# Altium PCB 百味勺子（立创EDA、AD）_2021-08-16.pcbdoc
Units mm, origin at the board's own origin, x right, y up, seen from the top; angles counter-clockwise.
Board outline 55.17 x 100.31 mm, 2 copper layers (Top Layer, Bottom Layer); 64 components, 36 nets, 177 pads, 29 vias.
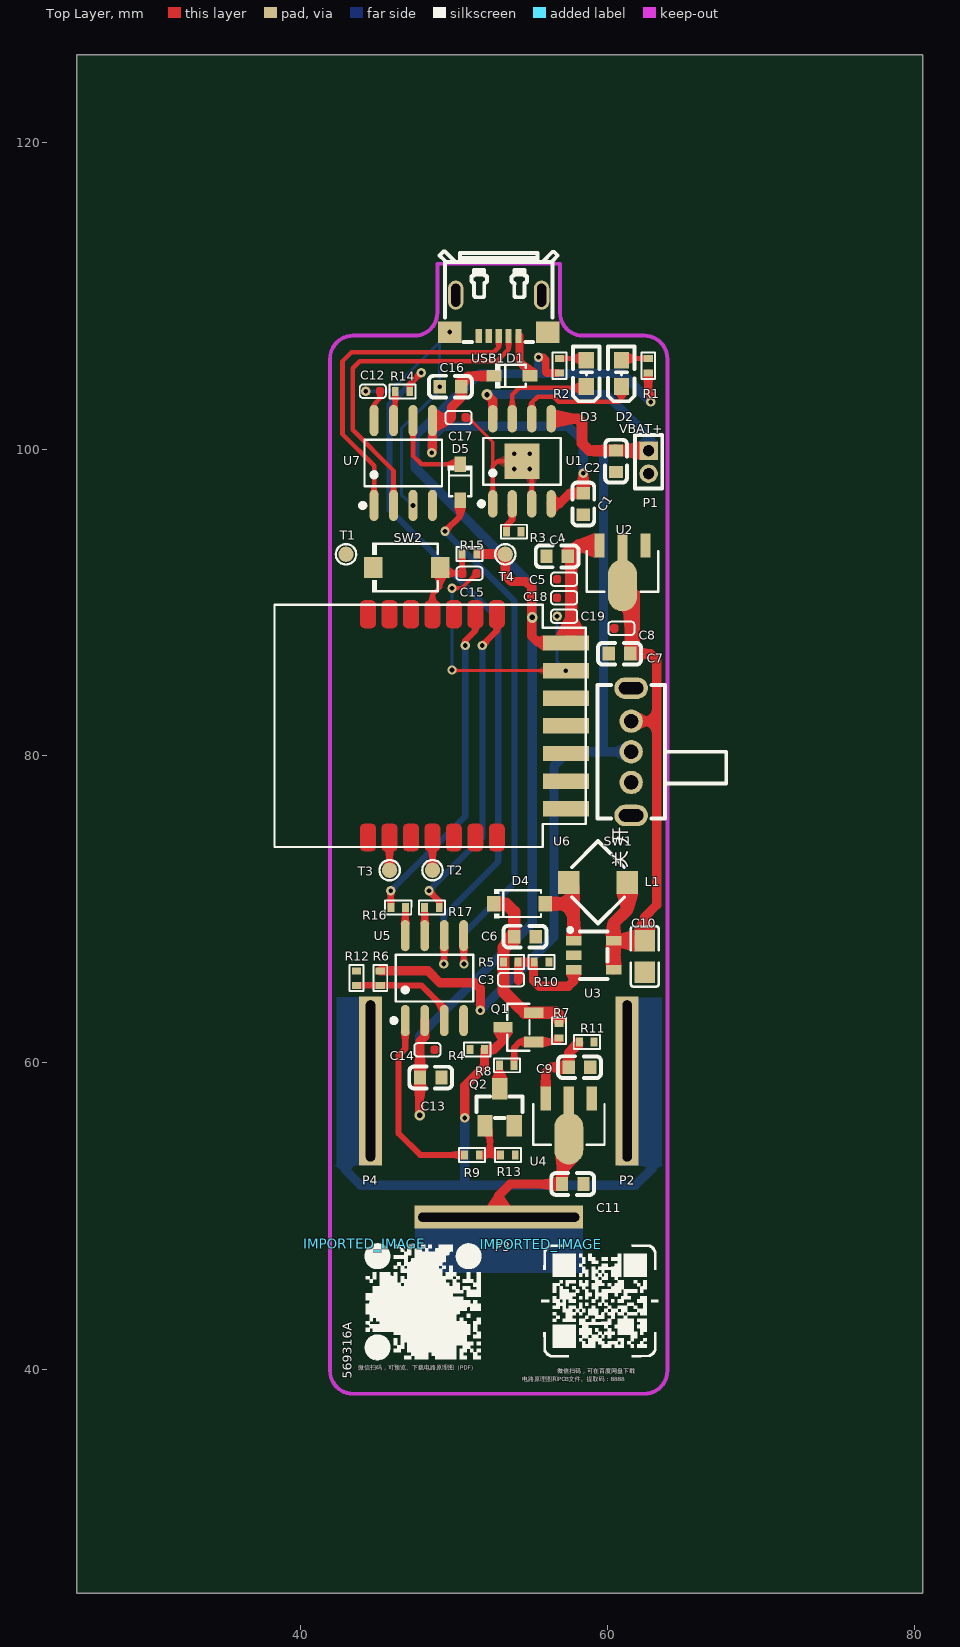
[diagram p0: Top Layer view]
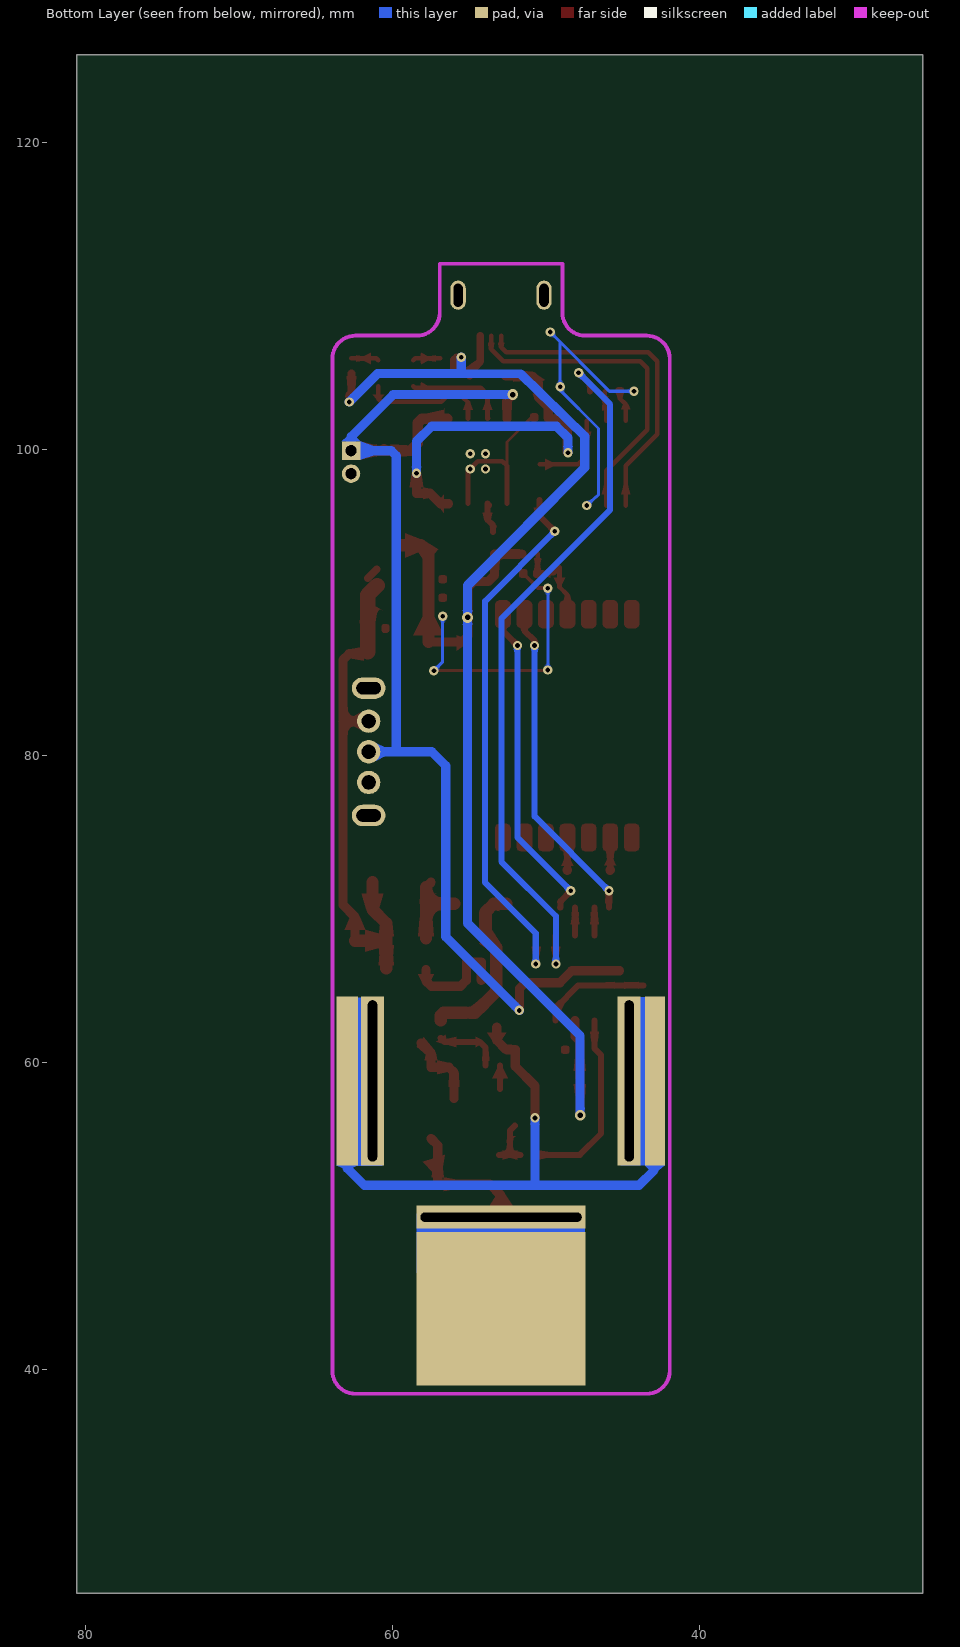
[diagram p1: Bottom Layer view, seen from below]

## Layer stack, top to bottom
Top Layer: signal copper (thickness not stored)
Dielectric: dielectric 0.32, FR-4, Dk 4.8
Bottom Layer: signal copper (thickness not stored)

## Board outline
80.571,25.4 25.4,25.4 25.4,125.712 80.571,125.712

## Components (designator, comment, footprint, x,y, rotation, side; value= is the part's Value field where it differs from the comment)
C1 "106" C0603 58.42,96.42 r270 top
C2 "10uF/16V" C0603 60.554,99.214 r270 top
C3 "22pF" C0402_GRM15 53.718,65.406 r0 top
C4 "106" C0603 56.718,93.016 r180 top
C5 "104" C0402_GRM15 57.175,91.518 r180 top
C6 "1uF" C0603 54.624,68.2 r0 top
C7 "106" C0603 60.782,86.666 r180 top
C8 "104" C0402_GRM15 60.909,88.317 r180 top
C9 "106" C0603 58.177,59.691 r0 top
C10 "4.7uF" JMK212BJ475KG-T 62.778,70.719 r90 top
C11 "106" C0603 57.734,52.071 r0 top
C12 "0.1uF/50V" C0402_GRM15 44.701,103.778 r180 top
C13 "22uF/16V" C0603 48.474,59.031 r180 top
C14 "0.1uF/16V" C0402_GRM15 48.26,60.834 r180 top
C15 "104/10V" C0402_GRM15 51.003,91.899 r0 top
C16 "10uF/16V" C0603 49.759,104.065 r0 top
C17 "0.1uF/16V" C0402_GRM15 50.292,102.059 r180 top
C18 "104" C0402_GRM15 57.175,90.311 r180 top
C19 "103" C0402_GRM15 57.175,89.105 r180 top
D1 "1N5819WS" 1N5819WS 56.675,104.609 r0 top
D2 "绿色" OSR50603C1E 113.462,572.644 r90 top
D3 "红色" OSR50603C1E 111.176,572.644 r90 top
D4 "MBR0530" MBR0530 56.703,68.909 r0 top
D5 "1N5819WS" 1N5819WS 50.226,94.939 r270 top
IMPORTED_IMAGE "IMPORTED_IMAGE" IMPORTED_IMAGE 44.177,48.196 r0 top
IMPORTED_IMAGE "IMPORTED_IMAGE" IMPORTED_IMAGE 55.693,48.146 r0 top
L1 "6.8uH" CDRH3D23NP-6R8PC 62.915,73.313 r45 top
P1 "锂电池" "1.5MM 2P_Ӳ__" 62.687,99.9 r270 top
P2 "CON1" ____1#1 63.068,58.294 r0 top
P3 "CON1" ____1#2 53.543,51.69 r90 top
P4 "CON1" ____1#1 46.33,58.294 r0 top
Q1 "AO3401A" AO3401A 56.252,61.711 r0 top
Q2 "CJ2312" CJ2312 52.358,54.409 r270 top
R1 "102" R0402 62.662,105.437 r270 top
R2 "102" R0402 56.871,105.437 r270 top
R3 "222" R0402 53.899,94.616 r0 top
R4 "10K" R0402 51.511,60.852 r180 top
R5 "1.5M/%1" R0402 53.703,66.549 r180 top
R6 "100K/1%" R0402 45.187,65.508 r90 top
R7 "103" R0402 56.845,62.071 r270 top
R8 "10K" R0402 53.442,59.818 r180 top
R9 "103" R0402 51.163,53.976 r0 top
R10 "270k/%1" R0402 55.702,66.549 r180 top
R11 "100K/1%" R0402 58.656,61.342 r180 top
R12 "100K/1%" R0402 43.637,65.508 r270 top
R13 "104" R0402 53.51,53.976 r180 top
R14 "100R" R0402 46.634,103.76 r0 top
R15 "104/1%" R0402 51.002,93.169 r0 top
R16 "100R" R0402 46.355,70.105 r0 top
R17 "100R" R0402 48.557,70.105 r180 top
SW1 "SK12D07VG4" SK12D07VG4 61.544,80.265 r90 top
SW2 "TS-1088R" TS-1088R-02026 44.887,93.897 r180 top
T1 "TP" TP1 50.943,90.529 r0 top
T2 "TP" TP1 56.582,69.93 r0 top
T3 "TP" TP1 53.788,69.93 r0 top
T4 "TP" TP1 61.331,90.529 r0 top
U1 "XT2051Y2ASR-G" XT2051Y2ASR-G 56.21,96.773 r0 top
U2 "MD5333" MD5333 176.037,279.671 r90 top
U3 "TPS61040DBVR" TPS61040DBVR 54.932,66.743 r180 top
U4 "MD5333" MD5333 172.532,243.603 r90 top
U5 "STC8G1K08A-36I-SOP8" STC8G1K08A-36I-SOP8 53.289,65.024 r0 top
U6 "BTU" CBU1 51.679,74.741 r90 top
U7 "CH340N" CH340N 48.463,96.962 r0 top
USB1 "U-F-M5DS-Y-8" U-F-M5DS-Y-8 52.908,108.713 r180 top

## Footprints (in the part's own frame and the unit in brackets; to place one, negate y for a bottom-side part, rotate by r counter-clockwise, add the part's x,y. Pads: shape width x height; smd on the part's side, far side on the other; paste and mask are expansions set on the pad)
"1.5MM 2P_Ӳ__" [mm]
  rect 1.2x1.2 hole 0.7 slot 0.705 at 0 deg: 1(0,0)
  round 1.2 hole 0.7 slot 0.705 at 0 deg: 2(1.5,0)
  silkscreen extent -1.02,-0.89 2.47,0.89
1N5819WS [mm]
  rect 1x0.75 smd: 1(-4.072,0.167) 2(-1.727,0.167)
  silkscreen extent -3.98,-0.63 -2,0.97
____1#1 [mm]
  rect 1.5x11 hole 0.6 slot 10.5 at 90 deg: 1(-1.778,0.508)
____1#2 [mm]
  rect 1.5x11 hole 0.6 slot 10.5 at 90 deg: 1(-1.778,0.635)
AO3401A [mm]
  rect 1.25x0.7 smd: 1(-1.058,-0.363) 2(-1.058,1.536) 3(-3.058,0.586)
  silkscreen extent -2.78,-0.94 -1.33,2.11
C0402_GRM15 [mm]
  round 0 smd: 1(-0.46,0) 2(0.46,0)
  Top Layer region: 0.206,0.148 0.243,0.238 0.333,0.275 0.587,0.275 0.677,0.238 0.714,0.148 0.714,-0.148 0.677,-0.238 0.587,-0.275 0.333,-0.275 0.243,-0.238 0.206,-0.148
  Top Layer region: -0.714,0.148 -0.677,0.238 -0.587,0.275 -0.333,0.275 -0.243,0.238 -0.206,0.148 -0.206,-0.148 -0.243,-0.238 -0.333,-0.275 -0.587,-0.275 -0.677,-0.238 -0.714,-0.148
  Top Layer pour cut-out: -0.864,0.458 -0.864,0.152 -0.48,0.152 -0.48,0.457
  Top Layer pour cut-out: -0.864,-0.458 -0.864,-0.152 -0.48,-0.152 -0.48,-0.457
  Top Layer pour cut-out: 0.864,0.458 0.864,0.152 0.48,0.152 0.48,0.457
  Top Layer pour cut-out: -0.152,0.432 0.152,0.432 0.152,-0.432 -0.152,-0.432
  Top Layer pour cut-out: 0.864,-0.458 0.864,-0.152 0.48,-0.152 0.48,-0.457
  silkscreen extent -0.85,-0.44 0.85,0.44
C0603 [mm]
  rect 0.8x0.9 smd: 1(-0.7,0) 2(0.7,0)
  silkscreen extent -1.4,-0.7 1.4,0.72
CBU1 [mm]
  round 0 smd: 1(-0.063,7.291) 2(-0.063,5.891) 3(-0.063,4.492) 4(-0.063,3.091) 5(-0.063,1.691) 6(-0.063,0.291) 7(-0.063,-1.109) 15(14.491,-1.109) 16(14.491,0.291) 17(14.491,1.691) 18(14.491,3.091) 19(14.491,4.492) 20(14.491,5.891) 21(14.491,7.291)
  rect 1x3 smd: 8(1.814,-5.609) 9(3.614,-5.609) 10(5.414,-5.609) 11(7.214,-5.609) 12(9.014,-5.609) 13(10.814,-5.609) 14(12.614,-5.609)
  Top Layer region: -0.963,-0.859 -0.89,-0.682 -0.713,-0.609 0.587,-0.609 0.764,-0.682 0.837,-0.859 0.837,-1.359 0.764,-1.535 0.587,-1.609 -0.713,-1.609 -0.89,-1.535 -0.963,-1.359
  Top Layer region: 15.391,7.041 15.318,6.865 15.141,6.791 13.841,6.791 13.664,6.865 13.591,7.041 13.591,7.541 13.664,7.718 13.841,7.791 15.141,7.791 15.318,7.718 15.391,7.541
  Top Layer region: 15.391,5.641 15.318,5.465 15.141,5.391 13.841,5.391 13.664,5.465 13.591,5.641 13.591,6.141 13.664,6.318 13.841,6.391 15.141,6.391 15.318,6.318 15.391,6.141
  Top Layer region: 15.391,4.241 15.318,4.065 15.141,3.991 13.841,3.991 13.664,4.065 13.591,4.241 13.591,4.741 13.664,4.918 13.841,4.991 15.141,4.991 15.318,4.918 15.391,4.741
  Top Layer region: 15.391,-1.359 15.318,-1.535 15.141,-1.609 13.841,-1.609 13.664,-1.535 13.591,-1.359 13.591,-0.859 13.664,-0.682 13.841,-0.609 15.141,-0.609 15.318,-0.682 15.391,-0.859
  Top Layer region: 15.391,0.041 15.318,-0.135 15.141,-0.209 13.841,-0.209 13.664,-0.135 13.591,0.041 13.591,0.541 13.664,0.718 13.841,0.791 15.141,0.791 15.318,0.718 15.391,0.541
  Top Layer region: 15.391,1.441 15.318,1.265 15.141,1.191 13.841,1.191 13.664,1.265 13.591,1.441 13.591,1.941 13.664,2.118 13.841,2.191 15.141,2.191 15.318,2.118 15.391,1.941
  Top Layer region: 15.391,2.841 15.318,2.665 15.141,2.591 13.841,2.591 13.664,2.665 13.591,2.841 13.591,3.341 13.664,3.518 13.841,3.591 15.141,3.591 15.318,3.518 15.391,3.341
  Top Layer region: -0.963,0.541 -0.89,0.718 -0.713,0.791 0.587,0.791 0.764,0.718 0.837,0.541 0.837,0.041 0.764,-0.135 0.587,-0.209 -0.713,-0.209 -0.89,-0.135 -0.963,0.041
  Top Layer region: -0.963,7.541 -0.89,7.718 -0.713,7.791 0.587,7.791 0.764,7.718 0.837,7.541 0.837,7.041 0.764,6.865 0.587,6.791 -0.713,6.791 -0.89,6.865 -0.963,7.041
  Top Layer region: -0.963,6.141 -0.89,6.318 -0.713,6.391 0.587,6.391 0.764,6.318 0.837,6.141 0.837,5.641 0.764,5.465 0.587,5.391 -0.713,5.391 -0.89,5.465 -0.963,5.641
  Top Layer region: -0.963,4.741 -0.89,4.918 -0.713,4.991 0.587,4.991 0.764,4.918 0.837,4.741 0.837,4.241 0.764,4.065 0.587,3.991 -0.713,3.991 -0.89,4.065 -0.963,4.241
  Top Layer region: -0.963,3.341 -0.89,3.518 -0.713,3.591 0.587,3.591 0.764,3.518 0.837,3.341 0.837,2.841 0.764,2.665 0.587,2.591 -0.713,2.591 -0.89,2.665 -0.963,2.841
  Top Layer region: -0.963,1.941 -0.89,2.118 -0.713,2.191 0.587,2.191 0.764,2.118 0.837,1.941 0.837,1.441 0.764,1.265 0.587,1.191 -0.713,1.191 -0.89,1.265 -0.963,1.441
  silkscreen extent -0.69,-6.91 15.11,13.39
CDRH3D23NP-6R8PC [mm]
  rect 1.5x1.4 smd rot 45: 1(-4.944,2.742) 2(-2.243,0.042)
  silkscreen extent -5.49,-0.51 -1.69,3.29
CH340N [mil]
  oval 22.6x80.14 smd: 1(-144.98,-24.93) 2(-94.98,-24.93) 3(-44.98,-24.93) 4(5.02,-24.93) 5(5.02,193) 6(-44.98,193) 7(-94.98,193) 8(-144.98,193)
  silkscreen extent -180,-31 29,144
CJ2312 [mm]
  rect 1.4x1 smd: 1(-1.472,-0.339) 2(-1.472,1.561) 3(-3.872,0.611)
  silkscreen extent -3.37,-0.89 -1.97,2.11
IMPORTED_IMAGE [mm]
  silkscreen extent -0.01,-7.6 7.6,0.01
JMK212BJ475KG-T [mm]
  rect 1.41x1.35 smd: 1(-4.832,0.345) 2(-2.772,0.345)
  silkscreen extent -5.77,-0.56 -1.84,1.25
MBR0530 [mm]
  rect 0.88x0.99 smd: 1(-4.132,1.45) 2(-0.747,1.45)
  silkscreen extent -4.07,0.51 -1.03,2.39
MD5333 [mm]
  rect 1.575x0.672 smd: 1(-185.956,113.552) 3(-185.956,116.551)
  oval 3.372x1.898 smd: 2(-188.56,115.051)
  rect 1.833x0.672 smd: 2(-186.086,115.051)
  silkscreen extent -188.96,112.73 -186.31,117.38
OSR50603C1E [mil]
  rect 43x39 smd: 1(-18380,2069) 2(-18447,2069)
  silkscreen extent -18485,2035 -18344,2103
R0402 [mm]
  rect 0.45x0.6 smd: 1(-0.475,0) 2(0.475,0)
  Top Layer pour cut-out: -0.189,-0.453 -0.189,0.452 0.19,0.452 0.19,-0.453
  Top Layer pour cut-out: 0.889,0.178 0.889,0.483 0.509,0.483 0.509,0.178
  Top Layer pour cut-out: 0.889,-0.178 0.889,-0.483 0.509,-0.483 0.509,-0.178
  Top Layer pour cut-out: -0.889,0.178 -0.889,0.483 -0.509,0.483 -0.509,0.178
  Top Layer pour cut-out: -0.889,-0.178 -0.889,-0.483 -0.509,-0.483 -0.509,-0.178
  silkscreen extent -0.85,-0.45 0.85,0.45
SK12D07VG4 [mil]
  round 60 hole 36 slot 36.2 at 0 deg: 1(-78.74,0) 2(0,0) 3(78.74,0)
  oval 55.12x86.61 hole 31.5 slot 62.99 at 90 deg: 4(163.38,0) 5(-163.39,0)
  silkscreen extent -171,-244 171,87
STC8G1K08A-36I-SOP8 [mil]
  oval 22.6x80.14 smd: 1(-254.98,-89.93) 2(-204.98,-89.93) 3(-154.98,-89.93) 4(-104.98,-89.93) 5(-104.98,128) 6(-154.98,128) 7(-204.98,128) 8(-254.98,128)
  silkscreen extent -290,-96 -81,79
TP1 [mm]
  round 1 smd: 1(-7.991,2.614)
  silkscreen extent -8.66,1.95 -7.33,3.28
TPS61040DBVR [mm]
  rect 1x0.6 smd: 1(-2.869,-1.204) 2(-2.869,-0.254) 3(-2.869,0.696) 4(-5.469,0.696) 5(-5.469,-1.204)
  silkscreen extent -5.07,-2.03 -2.52,1.3
TS-1088R-02026 [mm]
  rect 1.23x1.36 smd: 1(-4.211,1.617) 2(0.159,1.617)
  silkscreen extent -4.05,0 0.23,3.23
U-F-M5DS-Y-8 [mm]
  rect 0.4x0.9 smd: 1(-1.3,1.326) 2(-0.65,1.326) 3(0,1.326) 4(0.65,1.326) 5(1.3,1.326)
  rect 1.54x1.4 smd: 6(3.2,1.076) 7(-3.2,1.075)
  oval 1x1.9 hole 0.6 slot 1.5 at 90 deg: 8(-2.8,-1.326) 9(2.8,-1.326)
  silkscreen extent -3.85,-4.17 3.85,1.74
XT2051Y2ASR-G [mm]
  oval 0.6x1.8 smd: 1(-3.687,-0.336) 2(-2.417,-0.336) 3(-1.147,-0.336) 4(0.123,-0.336) 5(0.123,5.209) 6(-1.147,5.209) 7(-2.417,5.209) 8(-3.687,5.209)
  rect 2.29x2.29 smd: 9(-1.782,2.436)
  silkscreen extent -4.58,-0.49 0.74,3.96

## Free pads (board coordinates)
  rect 1.3x11 smd far side: 19(42.875,58.802)
  rect 11x10 smd far side: 19(52.908,43.943)
  rect 1.4x11 smd far side: 19(62.941,58.802)

## Via types
v1: diameter 0.61, hole 0.305, Top Layer to Bottom Layer, 26 vias
v2: diameter 0.7, hole 0.35, Top Layer to Bottom Layer, 3 vias

## Nets (pads, with @x,y where several pads share a name; then routed paths per layer and width w, separated by ;. In a path a pad name is that pad's centre, name@x,y a point inside that pad or via, vN(x,y) a via of type N, cw(c..) or ccw(c..) an arc to the next point about the centre after c; other vN are vias at no path point)
3V3: C4.1 C5.1 C13.2 C14.2 C18.1 C19.1 R1.2 R2.2 R15.2 T4.1 U2.3 U5.2 U6.14 | length 98.6
  Top Layer w0.5: v1(55.499,105.996) 55.804,105.996 55.982,105.818 55.982,105.03 56.043,104.969 R2.2@56.794,104.969 ; R1.2@62.662,104.929 62.662,103.71 62.814,103.557 v1(62.814,103.075)
  Top Layer w0.6: v2(47.752,56.567) 47.752,59.008 C13.2 47.775,61.39 48.082,61.698 U5.2 ; R15.2@51.562,93.169 53.315,93.169 T4.1 53.34,91.772 53.746,91.365 54.686,91.365 55.067,90.984 55.067,87.809 55.448,87.428 U6.14@57.635,87.428
  Top Layer w0.8: U6.14@57.635,87.428 57.635,93.222 58.141,93.727 U2.3@59.385,93.727
  Bottom Layer w0.6: v2(47.752,56.567) 47.752,61.749 55.093,69.089 v2(55.093,89.028) 55.093,91.111 47.447,98.807 47.447,100.839 51.638,104.903 55.55,104.929 ; v1(55.499,105.996) 55.499,104.98 55.55,104.929 ; v1(62.814,103.075) 60.96,104.929 55.55,104.929
ADC: R6.1 R12.2 U5.3 | length 7.1
  Top Layer w0.4: R12.2 47.871,65.033 49.352,63.552 U5.3
BTU_RXD1: R16.1 U6.16 | length 21.5
  Top Layer w0.4: v1(45.872,71.198) 45.872,70.113 R16.1 ; v1@50.724,87.123 v1(50.724,87.2) 50.724,87.504 51.387,88.168 U6.16
  Bottom Layer w0.4: v1(45.872,71.198) 50.724,76.049 v1(50.724,87.2)
BTU_TXD1: R17.1 U6.15 | length 21.3
  Top Layer w0.4: v1(48.362,71.198) 49.032,70.527 R17.1 R17.1@49.047,70.121 ; v1(51.841,87.2) 52.787,88.145 U6.15
  Bottom Layer w0.4: v1(48.362,71.198) 51.841,74.677 v1(51.841,87.2)
D+: U7.1 USB1.3 | length 21.6
  Top Layer w0.3: U7.1 44.78,98.909 42.723,100.966 42.723,105.742 43.307,106.326 52.578,106.326 52.908,106.656 USB1.3
D-: U7.2 USB1.2 | length 21.6
  Top Layer w0.3: U7.2 46.05,98.604 43.383,101.271 43.383,105.284 43.84,105.742 52.777,105.742 53.558,106.523 USB1.2
GND: C1.2 C2.2 C4.2 C5.2 C6.2 C7.2 C8.2 C9.2 C10.1 C11.2 C12.2 C13.1 C14.1 C15.2 C16.1 C17.1 C18.2 C19.2 P1.2 Q2.2 R3.2 R4.2 R10.1 R11.1 R12.1 R13.1 SW1.4 SW1.5 SW2.2 T1.1 U1.1 U1.3 U1.9 U2.1 U3.2 U4.1 U5.4 U6.13 U7.3 USB1.4 USB1.5 USB1.6 USB1.7 USB1.8 USB1.9 | length 52.5
  Top Layer w0.203: v1(49.86,85.599) 49.905,85.555 v1(57.287,85.555) ; 50.876,102.109 52.523,100.463 U1.1
  Top Layer w0.254: v1(49.86,90.933) 50.498,90.933 C15.2
  Top Layer w0.3: U1.1 52.523,98.905 52.827,99.209 U1.9 55.063,98.574 U1.3
  Bottom Layer w0.203: v1(44.241,103.777) 45.848,103.777 v1(49.708,107.638) 49.059,106.988 v1(49.059,104.065) 49.059,103.848 46.558,101.347 46.558,97.029 v1(47.32,96.328) ; v1(49.86,85.599) 49.86,86.995 v1(49.86,90.933) ; v1(56.715,89.105) 56.715,86.126 v1(57.287,85.555)
  other v1: 53.928,98.709 54.928,98.709 53.928,99.709 54.928,99.709
LED1: D2.2 U1.6 | length 8.1
  Top Layer w0.3: U1.6 55.063,103.045 55.448,103.43 56.48,103.43 56.81,103.1 60.731,103.1 60.909,103.278 D2.2
LED2: D3.2 U1.7 | length 6.7
  Top Layer w0.3: U1.7@53.746,102.028 U1.7 53.793,103.553 54.237,103.997 58.53,103.997 D3.2
NETC3_2: C3.2 R5.1 R10.2 U3.3 | length 6.9
  Top Layer w0.6: 54.204,65.367 R5.1@54.204,66.549 ; R5.1@54.254,66.549 R10.2@55.143,66.549 ; R10.2@55.169,66.549 55.169,65.356 55.55,64.975 57.455,64.975 57.801,65.321 U3.3
NETC9_1: C9.1 R11.2 U4.3 | length 5.2
  Top Layer w0.6: U4.3 55.98,59.36 56.312,59.691 C9.1 57.477,60.639 R11.2@58.123,61.284
NETC11_1: C11.1 P3.1 pad.19@52.908,43.943 U4.2 | length 9
  Top Layer w0.4: P3.1 P3.1@52.935,49.939
  Top Layer w0.6: P3.1 52.908,51.335 53.645,52.071 C11.1 57.034,54.597 U4.2@57.48,55.043
NETC12_1: C12.1 U7.8 | length 2.1
  Top Layer w0.3: U7.8 44.78,102.919 45.161,103.3 C12.1
NETD1_2: D1.2 USB1.1 | length 2.9
  Top Layer w0.5: USB1.1@54.268,107.376 54.268,105.728 54.949,105.047 D1.2
NETD2_1: D2.1 R1.1 | length 1.8
  Top Layer w0.3: D2.1 61.036,105.919 R1.1@62.687,105.919
NETD3_1: D3.1 R2.1 | length 1.8
  Top Layer w0.3: R2.1@56.871,105.919 58.496,105.919 D3.1
NETD4_2: D4.2 L1.1 U3.1 | length 5.6
  Top Layer w0.6: L1.1 L1.1@57.801,71.435
  Top Layer w0.8: D4.2 57.801,70.359 ; U3.1@57.801,68.099 57.801,70.359 ; L1.1@57.801,71.435 57.801,70.359
NETD5_1: D5.1 U7.6 | length 5.6
  Top Layer w0.3: U7.6 47.32,99.569 47.879,99.011 D5.1
NETQ1_1: Q1.1 R7.2 R8.1 | length 4.3
  Top Layer w0.4: R8.1 53.917,60.979 54.285,61.347 Q1.1 56.596,61.347 R7.2
NETQ2_1: Q2.1 R9.2 R13.2 | length 3.4
  Top Layer w0.4: R9.2 52.337,53.976 ; Q2.1 52.337,55.564 52.337,53.976 ; R13.2 52.337,53.976
NETQ2_3: Q2.3 R8.2 | length 1.5
  Top Layer w0.4: R8.2 52.969,59.816 Q2.3
NETR3_1: R3.1 U1.2 | length 2.1
  Top Layer w0.4: R3.1 53.424,95.03 53.793,95.399 U1.2 U1.2@53.695,96.339
NETR14_1: R14.1 U7.7 | length 1.9
  Top Layer w0.3: U7.7 46.05,102.821 46.159,102.93 R14.1
P5.4: R9.1 U5.1 | length 12.4
  Top Layer w0.4: U5.1 46.812,60.911 46.38,60.479 46.38,55.373 47.777,53.976 R9.1
PD7: T3.1 U6.2 | length 2.1
  Top Layer w0.4: T3.1@45.787,72.553 U6.2
  Top Layer w0.6: T3.1@45.787,72.553 T3.1
RESETB: C15.1 R15.1 SW2.1 U6.18 | length 6.1
  Top Layer w0.3: U6.18 48.587,90.499 49.098,91.01 SW2.1 49.479,91.899 C15.1 ; 50.527,91.914 R15.1
  Top Layer w0.4: 50.527,91.914 C15.1
RXD: D5.2 U5.5 | length 35.8
  Top Layer w0.4: v1@49.454,94.642 v1(49.403,94.642) 50.394,95.632 D5.2 ; U5.5 50.622,66.448 v1(50.648,66.422)
  Bottom Layer w0.4: v1(49.403,94.642) 53.95,90.095 53.95,71.731 50.648,68.429 v1(50.648,66.422)
RXD1: R17.2 U5.7 | length 1.8
  Top Layer w0.4: U5.7 R17.2
SWS: T2.1 U6.4 | length 2.1
  Top Layer w0.4: T2.1@48.587,72.547 U6.4
  Top Layer w0.6: T2.1@48.587,72.547 T2.1
TXD: R14.2 U5.6 | length 47.2
  Top Layer w0.4: R14.2 47.109,104.235 v1(47.854,104.98) ; v1(49.327,66.422) 49.352,66.448 U5.6
  Bottom Layer w0.4: v1(47.854,104.98) 45.796,102.922 45.796,96.039 52.883,88.952 52.883,73.103 49.327,69.547 v1(49.327,66.422)
TXD1: R16.2 U5.8 | length 1.8
  Top Layer w0.4: U5.8 R16.2@46.812,70.105
USB_5V: C1.1 C16.2 C17.2 D1.1 U1.4 U7.5 | length 25.6
  Top Layer w0.6: v1(48.539,99.773) 48.59,99.823 U7.5 49.637,101.864 C17.2 49.832,102.742 50.459,103.368 C16.2 50.459,104.333 50.902,104.776 D1.1 ; U1.4 56.862,96.437 57.545,97.12 C1.1 v1(58.42,98.426)
  Bottom Layer w0.6: v1(48.539,99.773) 48.539,100.738 49.301,101.5 57.429,101.5 58.42,100.509 v1(58.42,98.426)
V_OUT: P2.1 P4.1 pad.19@42.875,58.802 pad.19@62.941,58.802 Q1.3 R4.1 | length 46.3
  Top Layer w0.6: v1(50.698,56.389) 50.698,58.472 51.986,59.76 R4.1 52.595,60.851 53.194,61.451 Q1.3
  Bottom Layer w0.6: pad.19@42.875,58.802 42.926,58.802 42.926,52.986 43.917,51.995 50.724,51.995 ; v1(50.698,56.389) 50.698,52.021 50.724,51.995 ; P2.1 pad.19@62.789,58.802 ; pad.19@62.789,59.26 pad.19@62.789,58.802 ; 50.724,51.995 61.824,51.995 62.941,53.113 62.941,58.802 pad.19@62.789,58.802
VBAT: C2.1 P1.1 R6.2 SW1.2 U1.5 U1.8 | length 76.6
  Top Layer w0.6: R6.2 48.293,65.983 49.073,65.203 51.333,65.203 51.714,64.822 v1(51.714,63.4) ; v2(52.146,103.557) 52.523,103.181 U1.8 ; C2.1@60.528,100.027 60.554,100.027 60.681,99.9 60.568,99.9 C2.1
  Top Layer w0.7: U1.5@56.413,101.982 58.065,101.982 58.344,101.703 58.344,100.382 58.826,99.9 C2.1@60.568,99.9 ; C2.1@60.681,99.9 P1.1
  Bottom Layer w0.6: v1(51.714,63.4) 56.515,68.2 56.515,79.351 57.429,80.265 SW1.2 ; v2(52.146,103.557) 59.944,103.557 62.687,100.814 P1.1 60.071,99.9 59.741,99.569 59.741,80.291
VBAT_BOOST_8V: C3.1 C6.1 D4.1 Q1.2 R5.2 R7.1 | length 11.4
  Top Layer w0.8: D4.1 53.391,70.359 53.924,69.826 C6.1 53.228,67.504 53.228,64.629 54.61,63.247 Q1.2@54.94,63.247 ; Q1.2 56.667,63.247 56.845,63.07 R7.1@56.845,62.739
VBAT_OUT: C7.1 C8.1 C10.2 L1.2 SW1.3 U2.2 U3.4 U3.5 | length 35.4
  Top Layer w0.5: U2.2@61.011,92.178 U2.2@61.609,91.58
  Top Layer w0.6: SW1.3 63.221,82.265 ; C7.1@61.609,86.666 62.814,86.666 63.221,86.26 63.221,82.265 ; C10.2 62.433,69.496 63.221,70.283 63.221,82.265
  Top Layer w0.8: U3.4@60.401,66.143 U3.5 C10.2 ; U3.5@60.401,68.048 60.401,69.089 61.299,69.987 L1.2
  Top Layer w1: U2.2@60.985,91.111 61.609,90.487 C7.1@61.609,86.779
pads on no net: SW1.1 U6.1 U6.3 U6.5 U6.6 U6.7 U6.8 U6.9 U6.10 U6.11 U6.12 U6.17 U6.19 U6.20 U6.21 U7.4

## Polygon pours and split planes (outlines as drawn)
GND on Bottom Layer (solid): 41.859,39.676 42.299,38.616 43.359,38.176 62.359,38.176 63.42,38.616 63.859,39.676 63.859,105.676 63.42,106.737 62.359,107.176 58.359,107.176 57.299,107.616 56.859,108.676 56.859,111.868 48.859,111.868 48.859,108.676 48.42,107.616 47.359,107.176 43.359,107.176 42.299,106.737 41.859,105.676
GND on Top Layer (solid): 41.935,39.6 42.375,38.539 43.435,38.1 62.435,38.1 63.496,38.539 63.935,39.6 63.935,105.6 63.496,106.661 62.435,107.1 58.435,107.1 57.375,107.539 56.935,108.6 56.935,111.792 48.935,111.792 48.935,108.6 48.496,107.539 47.435,107.1 43.435,107.1 42.375,106.661 41.935,105.6

## Keep-outs
Keep-Out Layer:
  lines w0.254: 41.908,39.899 ccw(c43.408,39.899) 43.408,38.399 ; 41.908,105.899 cw(c43.408,105.899) 43.408,107.399 ; 47.408,107.399 ccw(c47.408,108.899) 48.908,108.899 ; 56.908,108.899 ccw(c58.408,108.899) 58.408,107.399 ; 62.408,38.399 ccw(c62.408,39.899) 63.908,39.899 ; 62.408,107.399 cw(c62.408,105.899) 63.908,105.899

## Other copper
Top Layer:
  drawing of 228 lines, arcs and shapes, not listed
Bottom Layer:
  region net 3V3: 55.355,89.26 54.83,89.26 54.793,89.505 55.393,89.505
  region net 3V3: 55.355,88.797 54.83,88.797 54.793,88.552 55.393,88.552
  region net 3V3: 48.015,56.799 47.49,56.799 47.452,57.044 48.052,57.044
  region net 3V3: 62.833,103.379 62.51,103.056 62.309,103.156 62.733,103.58
  region net V_OUT: 62.04,59.552 62.04,58.052 62.789,58.502 62.789,59.102
  region net VBAT: 62.087,100.5 63.287,100.5 62.987,100.814 62.387,100.814
  region net VBAT: 62.087,99.3 62.087,100.5 61.187,100.2 61.187,99.6
  region net V_OUT: 62.241,58.052 62.241,59.552 61.341,59.102 61.341,58.502
  region net V_OUT: 63.641,53.302 62.241,53.302 62.641,53.113 63.241,53.113
  region net V_OUT: 43.525,53.302 42.225,53.302 42.626,52.986 43.226,52.986
  region net TXD: 47.873,104.675 47.549,104.999 47.419,104.828 47.702,104.545
  region net VBAT: 52.019,63.381 51.695,63.704 51.796,63.905 52.22,63.481
  region net V_OUT: 50.47,56.188 50.927,56.188 50.998,55.974 50.398,55.974
  region net RXD: 49.707,94.661 49.384,94.338 49.555,94.207 49.838,94.49
  region net USB_5V: 58.191,98.628 58.649,98.628 58.72,98.841 58.12,98.841
  region net USB_5V: 48.311,99.974 48.768,99.974 48.839,100.188 48.239,100.188
  region net VBAT: 52.378,103.295 52.378,103.82 52.623,103.857 52.623,103.257
  region net 3V3: 55.27,105.794 55.728,105.794 55.799,105.581 55.199,105.581
  region net BTU_TXD1: 51.613,86.998 52.07,86.998 52.041,86.785 51.641,86.785
  region net BTU_TXD1: 48.666,71.179 48.343,71.502 48.514,71.632 48.796,71.35
  region net BTU_RXD1: 50.495,86.998 50.952,86.998 50.924,86.785 50.524,86.785
  region net TXD: 49.098,66.624 49.555,66.624 49.527,66.837 49.127,66.837
  region net RXD: 50.419,66.624 50.876,66.624 50.848,66.837 50.448,66.837
  region net BTU_RXD1: 46.177,71.179 45.853,71.502 46.024,71.632 46.307,71.35
  region net VBAT: 61.04,79.694 61.04,80.837 60.507,80.565 60.507,79.965
  pour cut-out: 38.329,89.841 38.354,89.867 55.855,89.867 55.855,88.343 55.829,88.317 58.572,88.317 58.572,75.617 58.598,75.592 55.855,75.592 55.855,74.042 55.829,74.017 55.804,74.042 38.278,74.042 38.278,89.841 38.227,89.892
  region net VBAT: 60.387,80.565 60.462,80.568 60.534,80.575 60.603,80.586 60.669,80.603 60.732,80.624 60.792,80.649 60.849,80.68 60.902,80.715 60.953,80.754 61,80.799 61,79.732 60.953,79.776 60.902,79.816 60.849,79.851 60.792,79.881 60.732,79.907 60.669,79.928 60.603,79.944 60.534,79.956 60.462,79.963 60.387,79.965
  region net V_OUT: 62.637,58.502 62.523,58.499 62.42,58.49 62.33,58.475 62.251,58.454 62.185,58.427 62.131,58.394 62.088,58.355 62.058,58.31 62.04,58.259 62.034,58.202 62.034,59.402 62.04,59.345 62.058,59.294 62.088,59.249 62.131,59.21 62.185,59.177 62.251,59.15 62.33,59.129 62.42,59.114 62.523,59.105 62.637,59.102
  region net VBAT: 62.987,100.814 63.005,100.493 62.37,100.493 62.373,100.497 62.376,100.506 62.379,100.522 62.381,100.545 62.386,100.651 62.387,100.814
  region net VBAT: 61.49,100.2 61.604,100.203 61.706,100.211 61.796,100.226 61.874,100.247 61.94,100.274 61.994,100.306 62.036,100.345 62.066,100.39 62.084,100.44 62.09,100.497 62.09,99.303 62.084,99.359 62.066,99.41 62.036,99.454 61.994,99.493 61.94,99.525 61.874,99.552 61.796,99.573 61.706,99.588 61.604,99.597 61.49,99.6
  region net V_OUT: 42.626,52.986 42.626,53.047 42.61,53.305 42.606,53.308 43.246,53.308 43.242,53.305 43.239,53.296 43.236,53.279 43.233,53.257 43.228,53.15 43.226,52.986
  region net V_OUT: 61.644,59.102 61.759,59.105 61.861,59.114 61.952,59.129 62.03,59.15 62.097,59.177 62.151,59.21 62.193,59.249 62.223,59.294 62.241,59.345 62.247,59.402 62.247,58.202 62.241,58.259 62.223,58.31 62.193,58.355 62.151,58.394 62.097,58.427 62.03,58.454 61.952,58.475 61.861,58.49 61.759,58.499 61.644,58.502
  region net BTU_RXD1: 46.299,71.342 46.172,71.201 45.875,71.498 45.879,71.499 45.886,71.503 45.894,71.509 45.918,71.529 45.992,71.6 46.016,71.624
  region net RXD: 50.848,66.826 50.858,66.637 50.438,66.637 50.44,66.64 50.441,66.647 50.443,66.658 50.445,66.689 50.448,66.792 50.448,66.826
  region net TXD: 49.527,66.826 49.537,66.637 49.117,66.637 49.119,66.64 49.12,66.647 49.122,66.658 49.124,66.689 49.127,66.792 49.127,66.826
  region net BTU_RXD1: 50.524,86.796 50.514,86.985 50.934,86.985 50.932,86.982 50.93,86.975 50.929,86.964 50.926,86.933 50.924,86.83 50.924,86.796
  region net BTU_TXD1: 48.788,71.342 48.662,71.201 48.365,71.498 48.369,71.499 48.375,71.503 48.383,71.509 48.407,71.529 48.481,71.6 48.506,71.624
  region net BTU_TXD1: 51.641,86.796 51.631,86.985 52.051,86.985 52.049,86.982 52.048,86.975 52.046,86.964 52.044,86.933 52.041,86.83 52.041,86.796
  region net RXD: 49.547,94.215 49.406,94.342 49.703,94.639 49.704,94.635 49.708,94.629 49.714,94.62 49.735,94.597 49.806,94.522 49.83,94.498
  region net TXD: 47.427,104.836 47.554,104.977 47.851,104.68 47.847,104.678 47.84,104.675 47.832,104.668 47.808,104.648 47.734,104.577 47.71,104.553
  rectangle net NETC11_1: 47.447,46.28 58.42,50.166
  rectangle net NETC11_1: 52.197,48.49 52.222,50.192
  rectangle net V_OUT: 42.342,53.291 45.136,64.289
  rectangle net V_OUT: 60.655,53.24 63.551,64.238

## Silkscreen, mask and mechanical layers (free items; w line width, h text height)
Top Overlay:
  text "VBAT+" at 60.782,101.047 h0.6
  text "开" at 61.544,74.169 h1.52 r90
  text "关" at 61.544,72.645 h1.52 r90
  text "微信扫码，可预览、下载电路原理图（PDF）" at 43.764,39.879 h0.51
  text "微信扫码，可在百度网盘下载" at 56.718,39.625 h0.51
  text "569316A" at 43.51,39.371 h1.02 r90
  text "电路原理图和PCB文件。提取码：8888" at 54.432,39.117 h0.51
Mechanical 1:
  lines w0.013: 41.908,39.899 41.908,105.899 cw(c43.408,105.899) 43.408,107.399 47.408,107.399 ccw(c47.408,108.899) 48.908,108.899 48.908,112.092 56.908,112.092 56.908,108.899 ccw(c58.408,108.899) 58.408,107.399 62.408,107.399 cw(c62.408,105.899) 63.908,105.899 63.908,39.899 cw(c62.408,39.899) 62.408,38.399 43.408,38.399 cw(c43.408,39.899) 41.908,39.899 ; 47.408,49.399 47.408,50.399 58.408,50.399 58.408,49.399 47.408,49.399
Document:
  lines w0.013: 41.908,39.899 41.908,105.899 cw(c43.408,105.899) 43.408,107.399 47.408,107.399 ccw(c47.408,108.899) 48.908,108.899 48.908,112.092 56.908,112.092 56.908,108.899 ccw(c58.408,108.899) 58.408,107.399 62.408,107.399 cw(c62.408,105.899) 63.908,105.899 63.908,39.899 cw(c62.408,39.899) 62.408,38.399 43.408,38.399 cw(c43.408,39.899) 41.908,39.899